# EAGLE board Electret_Microphone_Breakout_Panel_v20 (EAGLE 7.5.0), part 1 of 6
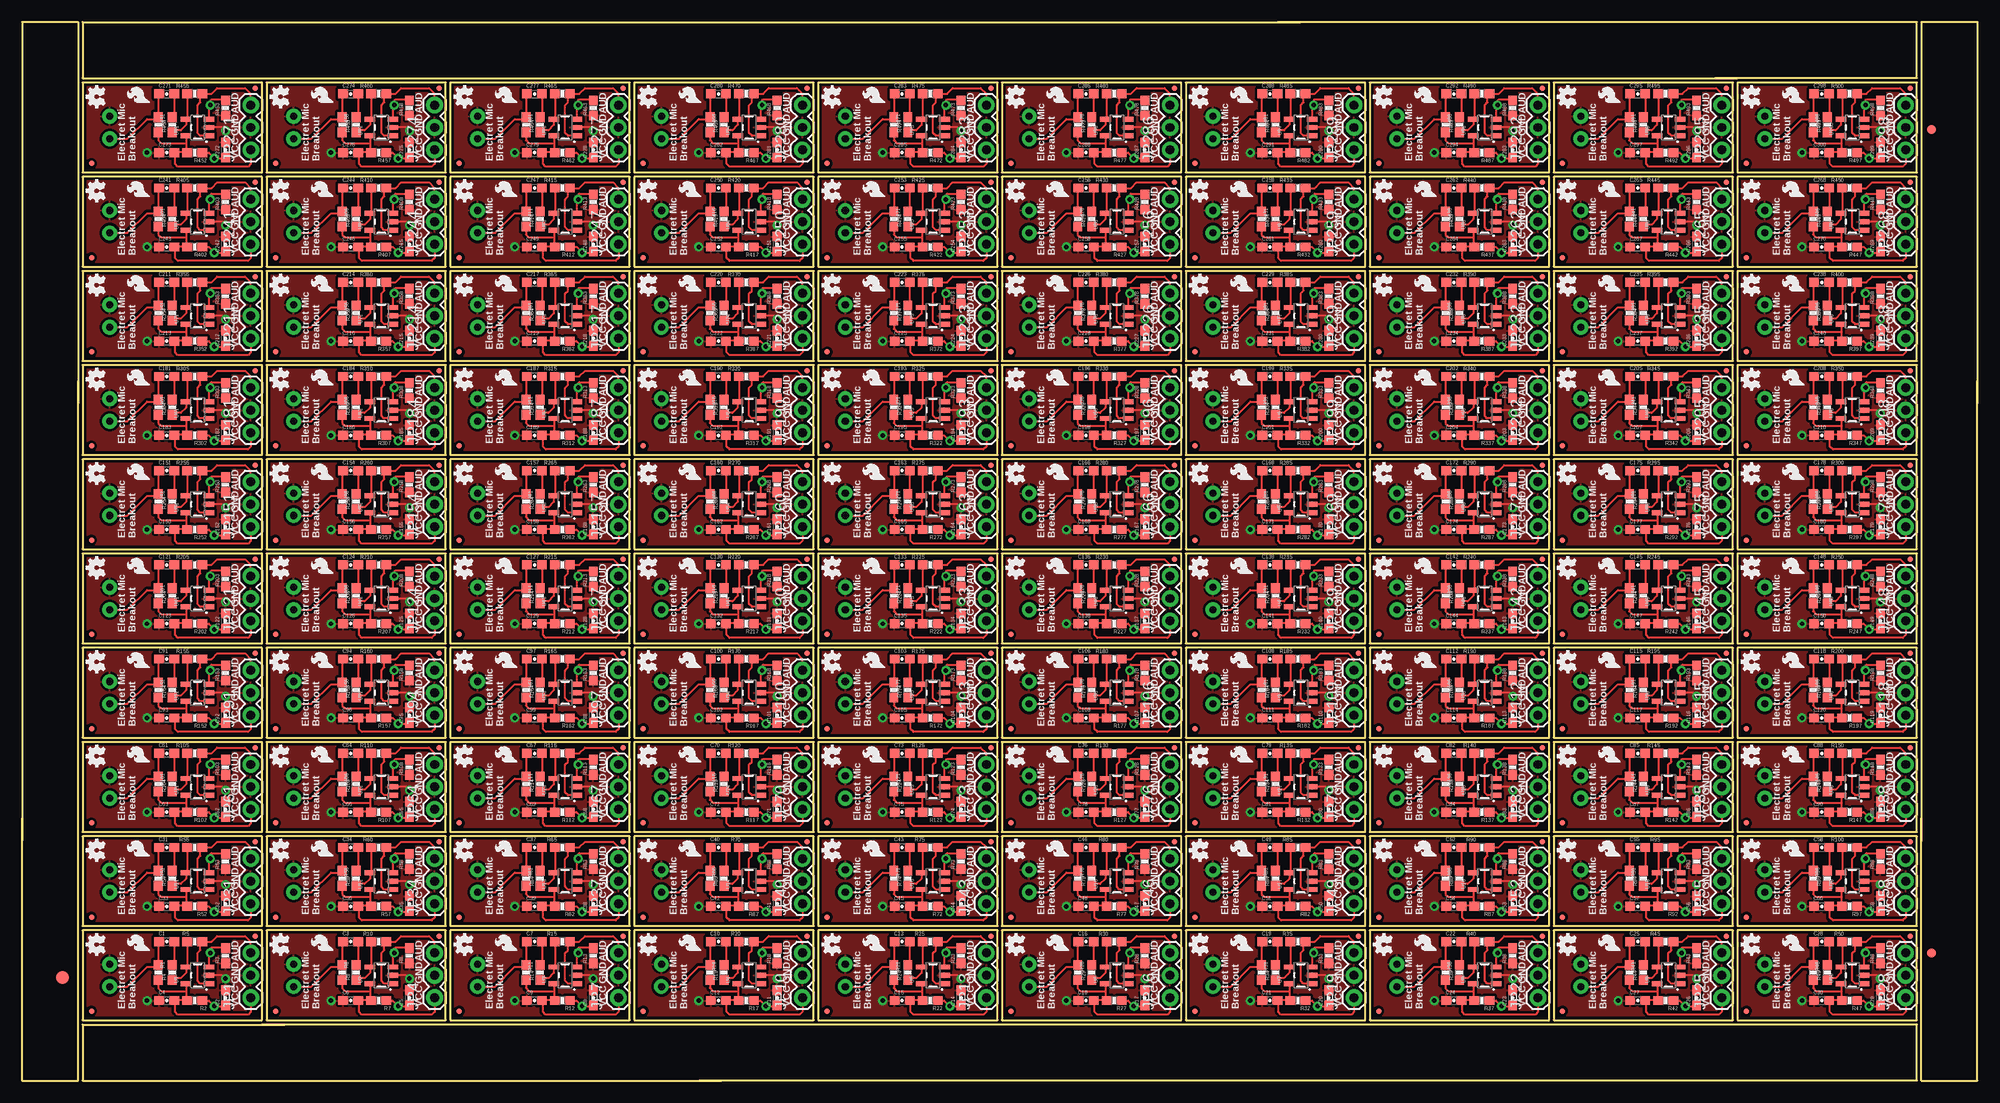
[diagram p0: board, top side]
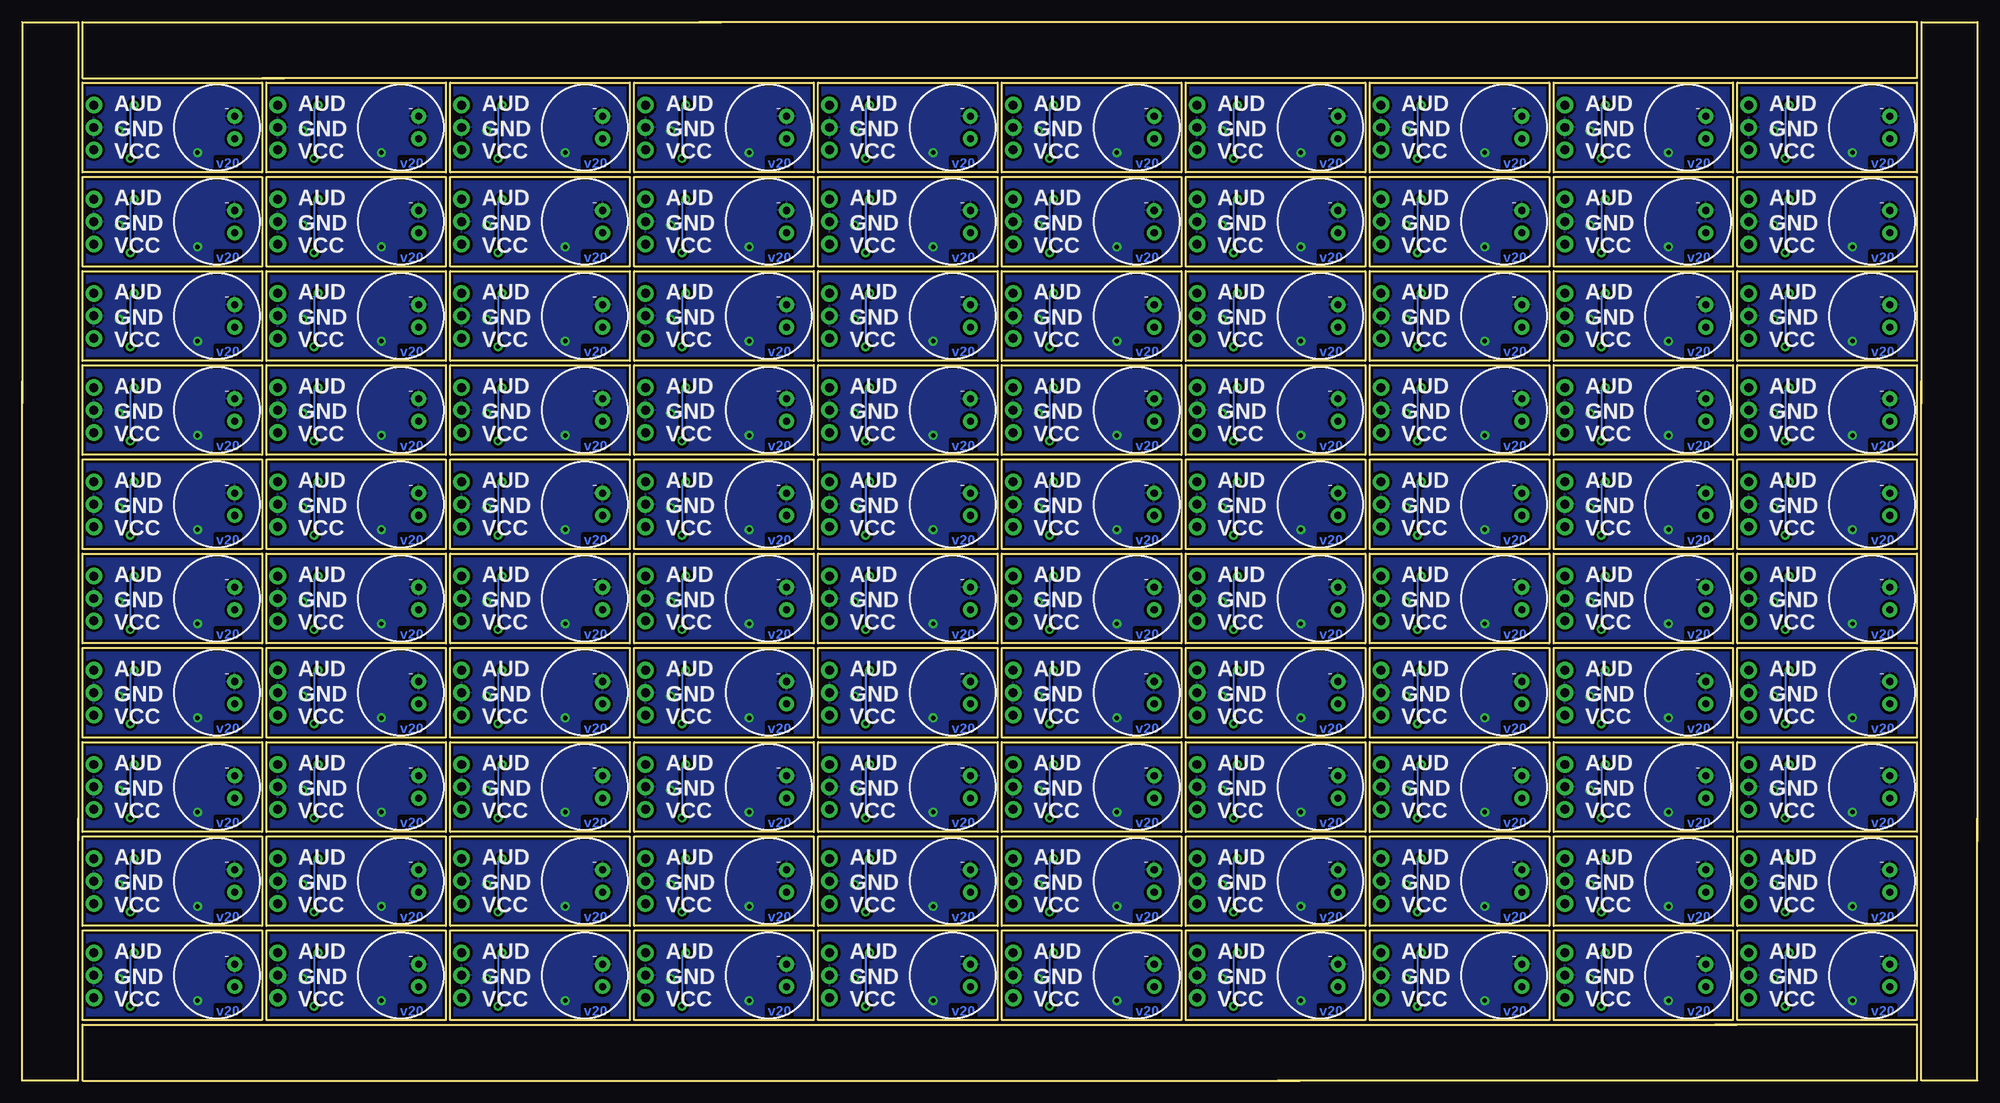
[diagram p1: board, bottom side, seen from below]

Size 221.49 x 119.89 mm. Coordinates in mm from the lower left corner, seen from the top.
Outline: 424 segments
Copper layers (1*16): Top 0.035mm / dielectric 1.5mm / Bottom 0.035mm
Design rules "SparkFun-2-layer-TIGHT *": minimum track width 10mil, minimum drill 20mil, track to track 10mil, track to pad 8mil, pad to pad 8mil, via to via 10mil, smd to smd 8mil, copper to edge 8mil, drill to drill 8mil, minimum pad ring 10mil, minimum via ring 10mil, stop-mask expansion 4mil, vias tented up to drill 20mil, thermal gap 10mil

## Footprints (pad centres in the part's own frame; a part is rotated, then mirrored left to right if it is on the bottom)
0603-CAP = smd 1.1 x 1: 1 -0.85,0; 2 0.85,0
FIDUCIAL-1.5X3 = smd 1.5 x 1.5: 1 0,0
FIDUCIAL-1X2 = smd 1 x 1: 1 0,0
1X03 = drill 1.016 pad 1.88: 1 0,0; 2 2.54,0; 3 5.08,0
MICRO-FIDUCIAL = smd 0.635 x 0.635: 1 0,0
MIC-9.7MM = drill 0.8 pad 1.676: 1 -2,1.27; 2 -2,-1.27
0603-RES = smd 1.1 x 1: 1 -0.85,0; 2 0.85,0
SOT23-5 = smd 0.55 x 1.2: 1 -0.95,-1.3; 2 0,-1.3; 3 0.95,-1.3; 4 0.95,1.3; 5 -0.95,1.3

## Placement (x,y rotation side)
C1  4.7uF  [0603-CAP]  16.38,15.75 0 top
C2  4.7uF  [0603-CAP]  23.05,9.4 90 top
C3  4.7uF  [0603-CAP]  37.21,15.75 0 top
C4  0.1uF  [0603-CAP]  16.38,9.08 0 top
C5  4.7uF  [0603-CAP]  43.88,9.4 90 top
C6  0.1uF  [0603-CAP]  37.21,9.08 0 top
C7  4.7uF  [0603-CAP]  58.04,15.75 0 top
C8  4.7uF  [0603-CAP]  64.71,9.4 90 top
C9  0.1uF  [0603-CAP]  58.04,9.08 0 top
C10  4.7uF  [0603-CAP]  78.87,15.75 0 top
C11  4.7uF  [0603-CAP]  85.53,9.4 90 top
C12  0.1uF  [0603-CAP]  78.87,9.08 0 top
C13  4.7uF  [0603-CAP]  99.69,15.75 0 top
C14  4.7uF  [0603-CAP]  106.36,9.4 90 top
C15  0.1uF  [0603-CAP]  99.69,9.08 0 top
C16  4.7uF  [0603-CAP]  120.52,15.75 0 top
C17  4.7uF  [0603-CAP]  127.19,9.4 90 top
C18  0.1uF  [0603-CAP]  120.52,9.08 0 top
C19  4.7uF  [0603-CAP]  141.35,15.75 0 top
C20  4.7uF  [0603-CAP]  148.02,9.4 90 top
C21  0.1uF  [0603-CAP]  141.35,9.08 0 top
C22  4.7uF  [0603-CAP]  162.18,15.75 0 top
C23  4.7uF  [0603-CAP]  168.85,9.4 90 top
C24  0.1uF  [0603-CAP]  162.18,9.08 0 top
C25  4.7uF  [0603-CAP]  183.01,15.75 0 top
C26  4.7uF  [0603-CAP]  189.67,9.4 90 top
C27  0.1uF  [0603-CAP]  183.01,9.08 0 top
C28  4.7uF  [0603-CAP]  203.84,15.75 0 top
C29  4.7uF  [0603-CAP]  210.5,9.4 90 top
C30  0.1uF  [0603-CAP]  203.84,9.08 0 top
C31  4.7uF  [0603-CAP]  16.38,26.42 0 top
C32  4.7uF  [0603-CAP]  23.05,20.07 90 top
C33  0.1uF  [0603-CAP]  16.38,19.75 0 top
C34  4.7uF  [0603-CAP]  37.21,26.42 0 top
C35  4.7uF  [0603-CAP]  43.88,20.07 90 top
C36  0.1uF  [0603-CAP]  37.21,19.75 0 top
C37  4.7uF  [0603-CAP]  58.04,26.42 0 top
C38  4.7uF  [0603-CAP]  64.71,20.07 90 top
C39  0.1uF  [0603-CAP]  58.04,19.75 0 top
C40  4.7uF  [0603-CAP]  78.87,26.42 0 top
C41  4.7uF  [0603-CAP]  85.53,20.07 90 top
C42  0.1uF  [0603-CAP]  78.87,19.75 0 top
C43  4.7uF  [0603-CAP]  99.69,26.42 0 top
C44  4.7uF  [0603-CAP]  106.36,20.07 90 top
C45  0.1uF  [0603-CAP]  99.69,19.75 0 top
C46  4.7uF  [0603-CAP]  120.52,26.42 0 top
C47  4.7uF  [0603-CAP]  127.19,20.07 90 top
C48  0.1uF  [0603-CAP]  120.52,19.75 0 top
C49  4.7uF  [0603-CAP]  141.35,26.42 0 top
C50  4.7uF  [0603-CAP]  148.02,20.07 90 top
C51  0.1uF  [0603-CAP]  141.35,19.75 0 top
C52  4.7uF  [0603-CAP]  162.18,26.42 0 top
C53  4.7uF  [0603-CAP]  168.85,20.07 90 top
C54  0.1uF  [0603-CAP]  162.18,19.75 0 top
C55  4.7uF  [0603-CAP]  183.01,26.42 0 top
C56  4.7uF  [0603-CAP]  189.67,20.07 90 top
C57  0.1uF  [0603-CAP]  183.01,19.75 0 top
C58  4.7uF  [0603-CAP]  203.84,26.42 0 top
C59  4.7uF  [0603-CAP]  210.5,20.07 90 top
C60  0.1uF  [0603-CAP]  203.84,19.75 0 top
C61  4.7uF  [0603-CAP]  16.38,37.08 0 top
C62  4.7uF  [0603-CAP]  23.05,30.73 90 top
C63  0.1uF  [0603-CAP]  16.38,30.42 0 top
C64  4.7uF  [0603-CAP]  37.21,37.08 0 top
C65  4.7uF  [0603-CAP]  43.88,30.73 90 top
C66  0.1uF  [0603-CAP]  37.21,30.42 0 top
C67  4.7uF  [0603-CAP]  58.04,37.08 0 top
C68  4.7uF  [0603-CAP]  64.71,30.73 90 top
C69  0.1uF  [0603-CAP]  58.04,30.42 0 top
C70  4.7uF  [0603-CAP]  78.87,37.08 0 top
C71  4.7uF  [0603-CAP]  85.53,30.73 90 top
C72  0.1uF  [0603-CAP]  78.87,30.42 0 top
C73  4.7uF  [0603-CAP]  99.69,37.08 0 top
C74  4.7uF  [0603-CAP]  106.36,30.73 90 top
C75  0.1uF  [0603-CAP]  99.69,30.42 0 top
C76  4.7uF  [0603-CAP]  120.52,37.08 0 top
C77  4.7uF  [0603-CAP]  127.19,30.73 90 top
C78  0.1uF  [0603-CAP]  120.52,30.42 0 top
C79  4.7uF  [0603-CAP]  141.35,37.08 0 top
C80  4.7uF  [0603-CAP]  148.02,30.73 90 top
C81  0.1uF  [0603-CAP]  141.35,30.42 0 top
C82  4.7uF  [0603-CAP]  162.18,37.08 0 top
C83  4.7uF  [0603-CAP]  168.85,30.73 90 top
C84  0.1uF  [0603-CAP]  162.18,30.42 0 top
C85  4.7uF  [0603-CAP]  183.01,37.08 0 top
C86  4.7uF  [0603-CAP]  189.67,30.73 90 top
C87  0.1uF  [0603-CAP]  183.01,30.42 0 top
C88  4.7uF  [0603-CAP]  203.84,37.08 0 top
C89  4.7uF  [0603-CAP]  210.5,30.73 90 top
C90  0.1uF  [0603-CAP]  203.84,30.42 0 top
C91  4.7uF  [0603-CAP]  16.38,47.75 0 top
C92  4.7uF  [0603-CAP]  23.05,41.4 90 top
C93  0.1uF  [0603-CAP]  16.38,41.08 0 top
C94  4.7uF  [0603-CAP]  37.21,47.75 0 top
C95  4.7uF  [0603-CAP]  43.88,41.4 90 top
C96  0.1uF  [0603-CAP]  37.21,41.08 0 top
C97  4.7uF  [0603-CAP]  58.04,47.75 0 top
C98  4.7uF  [0603-CAP]  64.71,41.4 90 top
C99  0.1uF  [0603-CAP]  58.04,41.08 0 top
C100  4.7uF  [0603-CAP]  78.87,47.75 0 top
C101  4.7uF  [0603-CAP]  85.53,41.4 90 top
C102  0.1uF  [0603-CAP]  78.87,41.08 0 top
C103  4.7uF  [0603-CAP]  99.69,47.75 0 top
C104  4.7uF  [0603-CAP]  106.36,41.4 90 top
C105  0.1uF  [0603-CAP]  99.69,41.08 0 top
C106  4.7uF  [0603-CAP]  120.52,47.75 0 top
C107  4.7uF  [0603-CAP]  127.19,41.4 90 top
C108  0.1uF  [0603-CAP]  120.52,41.08 0 top
C109  4.7uF  [0603-CAP]  141.35,47.75 0 top
C110  4.7uF  [0603-CAP]  148.02,41.4 90 top
C111  0.1uF  [0603-CAP]  141.35,41.08 0 top
C112  4.7uF  [0603-CAP]  162.18,47.75 0 top
C113  4.7uF  [0603-CAP]  168.85,41.4 90 top
C114  0.1uF  [0603-CAP]  162.18,41.08 0 top
C115  4.7uF  [0603-CAP]  183.01,47.75 0 top
C116  4.7uF  [0603-CAP]  189.67,41.4 90 top
C117  0.1uF  [0603-CAP]  183.01,41.08 0 top
C118  4.7uF  [0603-CAP]  203.84,47.75 0 top
C119  4.7uF  [0603-CAP]  210.5,41.4 90 top
C120  0.1uF  [0603-CAP]  203.84,41.08 0 top
C121  4.7uF  [0603-CAP]  16.38,58.42 0 top
C122  4.7uF  [0603-CAP]  23.05,52.07 90 top
C123  0.1uF  [0603-CAP]  16.38,51.75 0 top
C124  4.7uF  [0603-CAP]  37.21,58.42 0 top
C125  4.7uF  [0603-CAP]  43.88,52.07 90 top
C126  0.1uF  [0603-CAP]  37.21,51.75 0 top
C127  4.7uF  [0603-CAP]  58.04,58.42 0 top
C128  4.7uF  [0603-CAP]  64.71,52.07 90 top
C129  0.1uF  [0603-CAP]  58.04,51.75 0 top
C130  4.7uF  [0603-CAP]  78.87,58.42 0 top
C131  4.7uF  [0603-CAP]  85.53,52.07 90 top
C132  0.1uF  [0603-CAP]  78.87,51.75 0 top
C133  4.7uF  [0603-CAP]  99.69,58.42 0 top
C134  4.7uF  [0603-CAP]  106.36,52.07 90 top
C135  0.1uF  [0603-CAP]  99.69,51.75 0 top
C136  4.7uF  [0603-CAP]  120.52,58.42 0 top
C137  4.7uF  [0603-CAP]  127.19,52.07 90 top
C138  0.1uF  [0603-CAP]  120.52,51.75 0 top
C139  4.7uF  [0603-CAP]  141.35,58.42 0 top
C140  4.7uF  [0603-CAP]  148.02,52.07 90 top
C141  0.1uF  [0603-CAP]  141.35,51.75 0 top
C142  4.7uF  [0603-CAP]  162.18,58.42 0 top
C143  4.7uF  [0603-CAP]  168.85,52.07 90 top
C144  0.1uF  [0603-CAP]  162.18,51.75 0 top
C145  4.7uF  [0603-CAP]  183.01,58.42 0 top
C146  4.7uF  [0603-CAP]  189.67,52.07 90 top
C147  0.1uF  [0603-CAP]  183.01,51.75 0 top
C148  4.7uF  [0603-CAP]  203.84,58.42 0 top
C149  4.7uF  [0603-CAP]  210.5,52.07 90 top
C150  0.1uF  [0603-CAP]  203.84,51.75 0 top
C151  4.7uF  [0603-CAP]  16.38,69.09 0 top
C152  4.7uF  [0603-CAP]  23.05,62.74 90 top
C153  0.1uF  [0603-CAP]  16.38,62.42 0 top
C154  4.7uF  [0603-CAP]  37.21,69.09 0 top
C155  4.7uF  [0603-CAP]  43.88,62.74 90 top
C156  0.1uF  [0603-CAP]  37.21,62.42 0 top
C157  4.7uF  [0603-CAP]  58.04,69.09 0 top
C158  4.7uF  [0603-CAP]  64.71,62.74 90 top
C159  0.1uF  [0603-CAP]  58.04,62.42 0 top
C160  4.7uF  [0603-CAP]  78.87,69.09 0 top
C161  4.7uF  [0603-CAP]  85.53,62.74 90 top
C162  0.1uF  [0603-CAP]  78.87,62.42 0 top
C163  4.7uF  [0603-CAP]  99.69,69.09 0 top
C164  4.7uF  [0603-CAP]  106.36,62.74 90 top
C165  0.1uF  [0603-CAP]  99.69,62.42 0 top
C166  4.7uF  [0603-CAP]  120.52,69.09 0 top
C167  4.7uF  [0603-CAP]  127.19,62.74 90 top
C168  0.1uF  [0603-CAP]  120.52,62.42 0 top
C169  4.7uF  [0603-CAP]  141.35,69.09 0 top
C170  4.7uF  [0603-CAP]  148.02,62.74 90 top
C171  0.1uF  [0603-CAP]  141.35,62.42 0 top
C172  4.7uF  [0603-CAP]  162.18,69.09 0 top
C173  4.7uF  [0603-CAP]  168.85,62.74 90 top
C174  0.1uF  [0603-CAP]  162.18,62.42 0 top
C175  4.7uF  [0603-CAP]  183.01,69.09 0 top
C176  4.7uF  [0603-CAP]  189.67,62.74 90 top
C177  0.1uF  [0603-CAP]  183.01,62.42 0 top
C178  4.7uF  [0603-CAP]  203.84,69.09 0 top
C179  4.7uF  [0603-CAP]  210.5,62.74 90 top
C180  0.1uF  [0603-CAP]  203.84,62.42 0 top
C181  4.7uF  [0603-CAP]  16.38,79.76 0 top
C182  4.7uF  [0603-CAP]  23.05,73.41 90 top
C183  0.1uF  [0603-CAP]  16.38,73.09 0 top
C184  4.7uF  [0603-CAP]  37.21,79.76 0 top
C185  4.7uF  [0603-CAP]  43.88,73.41 90 top
C186  0.1uF  [0603-CAP]  37.21,73.09 0 top
C187  4.7uF  [0603-CAP]  58.04,79.76 0 top
C188  4.7uF  [0603-CAP]  64.71,73.41 90 top
C189  0.1uF  [0603-CAP]  58.04,73.09 0 top
C190  4.7uF  [0603-CAP]  78.87,79.76 0 top
C191  4.7uF  [0603-CAP]  85.53,73.41 90 top
C192  0.1uF  [0603-CAP]  78.87,73.09 0 top
C193  4.7uF  [0603-CAP]  99.69,79.76 0 top
C194  4.7uF  [0603-CAP]  106.36,73.41 90 top
C195  0.1uF  [0603-CAP]  99.69,73.09 0 top
C196  4.7uF  [0603-CAP]  120.52,79.76 0 top
C197  4.7uF  [0603-CAP]  127.19,73.41 90 top
C198  0.1uF  [0603-CAP]  120.52,73.09 0 top
C199  4.7uF  [0603-CAP]  141.35,79.76 0 top
C200  4.7uF  [0603-CAP]  148.02,73.41 90 top
C201  0.1uF  [0603-CAP]  141.35,73.09 0 top
C202  4.7uF  [0603-CAP]  162.18,79.76 0 top
C203  4.7uF  [0603-CAP]  168.85,73.41 90 top
C204  0.1uF  [0603-CAP]  162.18,73.09 0 top
C205  4.7uF  [0603-CAP]  183.01,79.76 0 top
C206  4.7uF  [0603-CAP]  189.67,73.41 90 top
C207  0.1uF  [0603-CAP]  183.01,73.09 0 top
C208  4.7uF  [0603-CAP]  203.84,79.76 0 top
C209  4.7uF  [0603-CAP]  210.5,73.41 90 top
C210  0.1uF  [0603-CAP]  203.84,73.09 0 top
C211  4.7uF  [0603-CAP]  16.38,90.42 0 top
C212  4.7uF  [0603-CAP]  23.05,84.07 90 top
C213  0.1uF  [0603-CAP]  16.38,83.76 0 top
C214  4.7uF  [0603-CAP]  37.21,90.42 0 top
C215  4.7uF  [0603-CAP]  43.88,84.07 90 top
C216  0.1uF  [0603-CAP]  37.21,83.76 0 top
C217  4.7uF  [0603-CAP]  58.04,90.42 0 top
C218  4.7uF  [0603-CAP]  64.71,84.07 90 top
C219  0.1uF  [0603-CAP]  58.04,83.76 0 top
C220  4.7uF  [0603-CAP]  78.87,90.42 0 top
C221  4.7uF  [0603-CAP]  85.53,84.07 90 top
C222  0.1uF  [0603-CAP]  78.87,83.76 0 top
C223  4.7uF  [0603-CAP]  99.69,90.42 0 top
C224  4.7uF  [0603-CAP]  106.36,84.07 90 top
C225  0.1uF  [0603-CAP]  99.69,83.76 0 top
C226  4.7uF  [0603-CAP]  120.52,90.42 0 top
C227  4.7uF  [0603-CAP]  127.19,84.07 90 top
C228  0.1uF  [0603-CAP]  120.52,83.76 0 top
C229  4.7uF  [0603-CAP]  141.35,90.42 0 top
C230  4.7uF  [0603-CAP]  148.02,84.07 90 top
C231  0.1uF  [0603-CAP]  141.35,83.76 0 top
C232  4.7uF  [0603-CAP]  162.18,90.42 0 top
C233  4.7uF  [0603-CAP]  168.85,84.07 90 top
C234  0.1uF  [0603-CAP]  162.18,83.76 0 top
C235  4.7uF  [0603-CAP]  183.01,90.42 0 top
C236  4.7uF  [0603-CAP]  189.67,84.07 90 top
C237  0.1uF  [0603-CAP]  183.01,83.76 0 top
C238  4.7uF  [0603-CAP]  203.84,90.42 0 top
C239  4.7uF  [0603-CAP]  210.5,84.07 90 top
C240  0.1uF  [0603-CAP]  203.84,83.76 0 top
C241  4.7uF  [0603-CAP]  16.38,101.09 0 top
C242  4.7uF  [0603-CAP]  23.05,94.74 90 top
C243  0.1uF  [0603-CAP]  16.38,94.42 0 top
C244  4.7uF  [0603-CAP]  37.21,101.09 0 top
C245  4.7uF  [0603-CAP]  43.88,94.74 90 top
C246  0.1uF  [0603-CAP]  37.21,94.42 0 top
C247  4.7uF  [0603-CAP]  58.04,101.09 0 top
C248  4.7uF  [0603-CAP]  64.71,94.74 90 top
C249  0.1uF  [0603-CAP]  58.04,94.42 0 top
C250  4.7uF  [0603-CAP]  78.87,101.09 0 top
C251  4.7uF  [0603-CAP]  85.53,94.74 90 top
C252  0.1uF  [0603-CAP]  78.87,94.42 0 top
C253  4.7uF  [0603-CAP]  99.69,101.09 0 top
C254  4.7uF  [0603-CAP]  106.36,94.74 90 top
C255  0.1uF  [0603-CAP]  99.69,94.42 0 top
C256  4.7uF  [0603-CAP]  120.52,101.09 0 top
C257  4.7uF  [0603-CAP]  127.19,94.74 90 top
C258  0.1uF  [0603-CAP]  120.52,94.42 0 top
C259  4.7uF  [0603-CAP]  141.35,101.09 0 top
C260  4.7uF  [0603-CAP]  148.02,94.74 90 top
C261  0.1uF  [0603-CAP]  141.35,94.42 0 top
C262  4.7uF  [0603-CAP]  162.18,101.09 0 top
C263  4.7uF  [0603-CAP]  168.85,94.74 90 top
C264  0.1uF  [0603-CAP]  162.18,94.42 0 top
C265  4.7uF  [0603-CAP]  183.01,101.09 0 top
C266  4.7uF  [0603-CAP]  189.67,94.74 90 top
C267  0.1uF  [0603-CAP]  183.01,94.42 0 top
C268  4.7uF  [0603-CAP]  203.84,101.09 0 top
C269  4.7uF  [0603-CAP]  210.5,94.74 90 top
C270  0.1uF  [0603-CAP]  203.84,94.42 0 top
C271  4.7uF  [0603-CAP]  16.38,111.76 0 top
C272  4.7uF  [0603-CAP]  23.05,105.41 90 top
C273  0.1uF  [0603-CAP]  16.38,105.09 0 top
C274  4.7uF  [0603-CAP]  37.21,111.76 0 top
C275  4.7uF  [0603-CAP]  43.88,105.41 90 top
C276  0.1uF  [0603-CAP]  37.21,105.09 0 top
C277  4.7uF  [0603-CAP]  58.04,111.76 0 top
C278  4.7uF  [0603-CAP]  64.71,105.41 90 top
C279  0.1uF  [0603-CAP]  58.04,105.09 0 top
C280  4.7uF  [0603-CAP]  78.87,111.76 0 top
C281  4.7uF  [0603-CAP]  85.53,105.41 90 top
C282  0.1uF  [0603-CAP]  78.87,105.09 0 top
C283  4.7uF  [0603-CAP]  99.69,111.76 0 top
C284  4.7uF  [0603-CAP]  106.36,105.41 90 top
C285  0.1uF  [0603-CAP]  99.69,105.09 0 top
C286  4.7uF  [0603-CAP]  120.52,111.76 0 top
C287  4.7uF  [0603-CAP]  127.19,105.41 90 top
C288  0.1uF  [0603-CAP]  120.52,105.09 0 top
C289  4.7uF  [0603-CAP]  141.35,111.76 0 top
C290  4.7uF  [0603-CAP]  148.02,105.41 90 top
C291  0.1uF  [0603-CAP]  141.35,105.09 0 top
C292  4.7uF  [0603-CAP]  162.18,111.76 0 top
C293  4.7uF  [0603-CAP]  168.85,105.41 90 top
C294  0.1uF  [0603-CAP]  162.18,105.09 0 top
C295  4.7uF  [0603-CAP]  183.01,111.76 0 top
C296  4.7uF  [0603-CAP]  189.67,105.41 90 top
C297  0.1uF  [0603-CAP]  183.01,105.09 0 top
C298  4.7uF  [0603-CAP]  203.84,111.76 0 top
C299  4.7uF  [0603-CAP]  210.5,105.41 90 top
C300  0.1uF  [0603-CAP]  203.84,105.09 0 top
E$1  [FIDUCIAL-1.5X3]  4.57,11.68 0 top
E$5  [FIDUCIAL-1X2]  216.28,14.48 0 top
E$6  [FIDUCIAL-1X2]  216.28,107.7 180 top
JP1  [1X03]  25.91,9.4 90 top
JP2  FIDUCIALUFIDUCIAL  [MICRO-FIDUCIAL]  26.42,16.38 0 top
JP3  FIDUCIALUFIDUCIAL  [MICRO-FIDUCIAL]  7.87,7.87 0 top
JP4  [1X03]  46.74,9.4 90 top
JP5  FIDUCIALUFIDUCIAL  [MICRO-FIDUCIAL]  47.24,16.38 0 top
JP6  FIDUCIALUFIDUCIAL  [MICRO-FIDUCIAL]  28.7,7.87 0 top
JP7  [1X03]  67.56,9.4 90 top
JP8  FIDUCIALUFIDUCIAL  [MICRO-FIDUCIAL]  68.07,16.38 0 top
JP9  FIDUCIALUFIDUCIAL  [MICRO-FIDUCIAL]  49.53,7.87 0 top
JP10  [1X03]  88.39,9.4 90 top
JP11  FIDUCIALUFIDUCIAL  [MICRO-FIDUCIAL]  88.9,16.38 0 top
JP12  FIDUCIALUFIDUCIAL  [MICRO-FIDUCIAL]  70.36,7.87 0 top
JP13  [1X03]  109.22,9.4 90 top
JP14  FIDUCIALUFIDUCIAL  [MICRO-FIDUCIAL]  109.73,16.38 0 top
JP15  FIDUCIALUFIDUCIAL  [MICRO-FIDUCIAL]  91.19,7.87 0 top
JP16  [1X03]  130.05,9.4 90 top
JP17  FIDUCIALUFIDUCIAL  [MICRO-FIDUCIAL]  130.56,16.38 0 top
JP18  FIDUCIALUFIDUCIAL  [MICRO-FIDUCIAL]  112.01,7.87 0 top
JP19  [1X03]  150.88,9.4 90 top
JP20  FIDUCIALUFIDUCIAL  [MICRO-FIDUCIAL]  151.38,16.38 0 top
JP21  FIDUCIALUFIDUCIAL  [MICRO-FIDUCIAL]  132.84,7.87 0 top
JP22  [1X03]  171.7,9.4 90 top
JP23  FIDUCIALUFIDUCIAL  [MICRO-FIDUCIAL]  172.21,16.38 0 top
JP24  FIDUCIALUFIDUCIAL  [MICRO-FIDUCIAL]  153.67,7.87 0 top
JP25  [1X03]  192.53,9.4 90 top
JP26  FIDUCIALUFIDUCIAL  [MICRO-FIDUCIAL]  193.04,16.38 0 top
JP27  FIDUCIALUFIDUCIAL  [MICRO-FIDUCIAL]  174.5,7.87 0 top
JP28  [1X03]  213.36,9.4 90 top
JP29  FIDUCIALUFIDUCIAL  [MICRO-FIDUCIAL]  213.87,16.38 0 top
JP30  FIDUCIALUFIDUCIAL  [MICRO-FIDUCIAL]  195.33,7.87 0 top
JP31  [1X03]  25.91,20.07 90 top
JP32  FIDUCIALUFIDUCIAL  [MICRO-FIDUCIAL]  26.42,27.05 0 top
JP33  FIDUCIALUFIDUCIAL  [MICRO-FIDUCIAL]  7.87,18.54 0 top
JP34  [1X03]  46.74,20.07 90 top
JP35  FIDUCIALUFIDUCIAL  [MICRO-FIDUCIAL]  47.24,27.05 0 top
JP36  FIDUCIALUFIDUCIAL  [MICRO-FIDUCIAL]  28.7,18.54 0 top
JP37  [1X03]  67.56,20.07 90 top
JP38  FIDUCIALUFIDUCIAL  [MICRO-FIDUCIAL]  68.07,27.05 0 top
JP39  FIDUCIALUFIDUCIAL  [MICRO-FIDUCIAL]  49.53,18.54 0 top
JP40  [1X03]  88.39,20.07 90 top
JP41  FIDUCIALUFIDUCIAL  [MICRO-FIDUCIAL]  88.9,27.05 0 top
JP42  FIDUCIALUFIDUCIAL  [MICRO-FIDUCIAL]  70.36,18.54 0 top
JP43  [1X03]  109.22,20.07 90 top
JP44  FIDUCIALUFIDUCIAL  [MICRO-FIDUCIAL]  109.73,27.05 0 top
JP45  FIDUCIALUFIDUCIAL  [MICRO-FIDUCIAL]  91.19,18.54 0 top
JP46  [1X03]  130.05,20.07 90 top
JP47  FIDUCIALUFIDUCIAL  [MICRO-FIDUCIAL]  130.56,27.05 0 top
JP48  FIDUCIALUFIDUCIAL  [MICRO-FIDUCIAL]  112.01,18.54 0 top
JP49  [1X03]  150.88,20.07 90 top
JP50  FIDUCIALUFIDUCIAL  [MICRO-FIDUCIAL]  151.38,27.05 0 top
JP51  FIDUCIALUFIDUCIAL  [MICRO-FIDUCIAL]  132.84,18.54 0 top
JP52  [1X03]  171.7,20.07 90 top
JP53  FIDUCIALUFIDUCIAL  [MICRO-FIDUCIAL]  172.21,27.05 0 top
JP54  FIDUCIALUFIDUCIAL  [MICRO-FIDUCIAL]  153.67,18.54 0 top
JP55  [1X03]  192.53,20.07 90 top
JP56  FIDUCIALUFIDUCIAL  [MICRO-FIDUCIAL]  193.04,27.05 0 top
JP57  FIDUCIALUFIDUCIAL  [MICRO-FIDUCIAL]  174.5,18.54 0 top
JP58  [1X03]  213.36,20.07 90 top
JP59  FIDUCIALUFIDUCIAL  [MICRO-FIDUCIAL]  213.87,27.05 0 top
JP60  FIDUCIALUFIDUCIAL  [MICRO-FIDUCIAL]  195.33,18.54 0 top
JP61  [1X03]  25.91,30.73 90 top
JP62  FIDUCIALUFIDUCIAL  [MICRO-FIDUCIAL]  26.42,37.72 0 top
JP63  FIDUCIALUFIDUCIAL  [MICRO-FIDUCIAL]  7.87,29.21 0 top
JP64  [1X03]  46.74,30.73 90 top
JP65  FIDUCIALUFIDUCIAL  [MICRO-FIDUCIAL]  47.24,37.72 0 top
JP66  FIDUCIALUFIDUCIAL  [MICRO-FIDUCIAL]  28.7,29.21 0 top
JP67  [1X03]  67.56,30.73 90 top
JP68  FIDUCIALUFIDUCIAL  [MICRO-FIDUCIAL]  68.07,37.72 0 top
JP69  FIDUCIALUFIDUCIAL  [MICRO-FIDUCIAL]  49.53,29.21 0 top
JP70  [1X03]  88.39,30.73 90 top
JP71  FIDUCIALUFIDUCIAL  [MICRO-FIDUCIAL]  88.9,37.72 0 top
JP72  FIDUCIALUFIDUCIAL  [MICRO-FIDUCIAL]  70.36,29.21 0 top
JP73  [1X03]  109.22,30.73 90 top
JP74  FIDUCIALUFIDUCIAL  [MICRO-FIDUCIAL]  109.73,37.72 0 top
JP75  FIDUCIALUFIDUCIAL  [MICRO-FIDUCIAL]  91.19,29.21 0 top
JP76  [1X03]  130.05,30.73 90 top
JP77  FIDUCIALUFIDUCIAL  [MICRO-FIDUCIAL]  130.56,37.72 0 top
JP78  FIDUCIALUFIDUCIAL  [MICRO-FIDUCIAL]  112.01,29.21 0 top
JP79  [1X03]  150.88,30.73 90 top
JP80  FIDUCIALUFIDUCIAL  [MICRO-FIDUCIAL]  151.38,37.72 0 top
JP81  FIDUCIALUFIDUCIAL  [MICRO-FIDUCIAL]  132.84,29.21 0 top
JP82  [1X03]  171.7,30.73 90 top
JP83  FIDUCIALUFIDUCIAL  [MICRO-FIDUCIAL]  172.21,37.72 0 top
JP84  FIDUCIALUFIDUCIAL  [MICRO-FIDUCIAL]  153.67,29.21 0 top
JP85  [1X03]  192.53,30.73 90 top
JP86  FIDUCIALUFIDUCIAL  [MICRO-FIDUCIAL]  193.04,37.72 0 top
JP87  FIDUCIALUFIDUCIAL  [MICRO-FIDUCIAL]  174.5,29.21 0 top
JP88  [1X03]  213.36,30.73 90 top
JP89  FIDUCIALUFIDUCIAL  [MICRO-FIDUCIAL]  213.87,37.72 0 top
JP90  FIDUCIALUFIDUCIAL  [MICRO-FIDUCIAL]  195.33,29.21 0 top
JP91  [1X03]  25.91,41.4 90 top
JP92  FIDUCIALUFIDUCIAL  [MICRO-FIDUCIAL]  26.42,48.39 0 top
JP93  FIDUCIALUFIDUCIAL  [MICRO-FIDUCIAL]  7.87,39.88 0 top
JP94  [1X03]  46.74,41.4 90 top
JP95  FIDUCIALUFIDUCIAL  [MICRO-FIDUCIAL]  47.24,48.39 0 top
JP96  FIDUCIALUFIDUCIAL  [MICRO-FIDUCIAL]  28.7,39.88 0 top
JP97  [1X03]  67.56,41.4 90 top
JP98  FIDUCIALUFIDUCIAL  [MICRO-FIDUCIAL]  68.07,48.39 0 top
JP99  FIDUCIALUFIDUCIAL  [MICRO-FIDUCIAL]  49.53,39.88 0 top
JP100  [1X03]  88.39,41.4 90 top
JP101  FIDUCIALUFIDUCIAL  [MICRO-FIDUCIAL]  88.9,48.39 0 top
JP102  FIDUCIALUFIDUCIAL  [MICRO-FIDUCIAL]  70.36,39.88 0 top
JP103  [1X03]  109.22,41.4 90 top
JP104  FIDUCIALUFIDUCIAL  [MICRO-FIDUCIAL]  109.73,48.39 0 top
JP105  FIDUCIALUFIDUCIAL  [MICRO-FIDUCIAL]  91.19,39.88 0 top
JP106  [1X03]  130.05,41.4 90 top
JP107  FIDUCIALUFIDUCIAL  [MICRO-FIDUCIAL]  130.56,48.39 0 top
JP108  FIDUCIALUFIDUCIAL  [MICRO-FIDUCIAL]  112.01,39.88 0 top
JP109  [1X03]  150.88,41.4 90 top
JP110  FIDUCIALUFIDUCIAL  [MICRO-FIDUCIAL]  151.38,48.39 0 top
JP111  FIDUCIALUFIDUCIAL  [MICRO-FIDUCIAL]  132.84,39.88 0 top
JP112  [1X03]  171.7,41.4 90 top
JP113  FIDUCIALUFIDUCIAL  [MICRO-FIDUCIAL]  172.21,48.39 0 top
JP114  FIDUCIALUFIDUCIAL  [MICRO-FIDUCIAL]  153.67,39.88 0 top
JP115  [1X03]  192.53,41.4 90 top
JP116  FIDUCIALUFIDUCIAL  [MICRO-FIDUCIAL]  193.04,48.39 0 top
JP117  FIDUCIALUFIDUCIAL  [MICRO-FIDUCIAL]  174.5,39.88 0 top
JP118  [1X03]  213.36,41.4 90 top
JP119  FIDUCIALUFIDUCIAL  [MICRO-FIDUCIAL]  213.87,48.39 0 top
JP120  FIDUCIALUFIDUCIAL  [MICRO-FIDUCIAL]  195.33,39.88 0 top
JP121  [1X03]  25.91,52.07 90 top
JP122  FIDUCIALUFIDUCIAL  [MICRO-FIDUCIAL]  26.42,59.05 0 top
JP123  FIDUCIALUFIDUCIAL  [MICRO-FIDUCIAL]  7.87,50.55 0 top
JP124  [1X03]  46.74,52.07 90 top
JP125  FIDUCIALUFIDUCIAL  [MICRO-FIDUCIAL]  47.24,59.05 0 top
JP126  FIDUCIALUFIDUCIAL  [MICRO-FIDUCIAL]  28.7,50.55 0 top
JP127  [1X03]  67.56,52.07 90 top
JP128  FIDUCIALUFIDUCIAL  [MICRO-FIDUCIAL]  68.07,59.05 0 top
JP129  FIDUCIALUFIDUCIAL  [MICRO-FIDUCIAL]  49.53,50.55 0 top
JP130  [1X03]  88.39,52.07 90 top
JP131  FIDUCIALUFIDUCIAL  [MICRO-FIDUCIAL]  88.9,59.05 0 top
JP132  FIDUCIALUFIDUCIAL  [MICRO-FIDUCIAL]  70.36,50.55 0 top
JP133  [1X03]  109.22,52.07 90 top
JP134  FIDUCIALUFIDUCIAL  [MICRO-FIDUCIAL]  109.73,59.05 0 top
JP135  FIDUCIALUFIDUCIAL  [MICRO-FIDUCIAL]  91.19,50.55 0 top
JP136  [1X03]  130.05,52.07 90 top
JP137  FIDUCIALUFIDUCIAL  [MICRO-FIDUCIAL]  130.56,59.05 0 top
JP138  FIDUCIALUFIDUCIAL  [MICRO-FIDUCIAL]  112.01,50.55 0 top
JP139  [1X03]  150.88,52.07 90 top
JP140  FIDUCIALUFIDUCIAL  [MICRO-FIDUCIAL]  151.38,59.05 0 top
JP141  FIDUCIALUFIDUCIAL  [MICRO-FIDUCIAL]  132.84,50.55 0 top
JP142  [1X03]  171.7,52.07 90 top
JP143  FIDUCIALUFIDUCIAL  [MICRO-FIDUCIAL]  172.21,59.05 0 top
JP144  FIDUCIALUFIDUCIAL  [MICRO-FIDUCIAL]  153.67,50.55 0 top
JP145  [1X03]  192.53,52.07 90 top
JP146  FIDUCIALUFIDUCIAL  [MICRO-FIDUCIAL]  193.04,59.05 0 top
JP147  FIDUCIALUFIDUCIAL  [MICRO-FIDUCIAL]  174.5,50.55 0 top
JP148  [1X03]  213.36,52.07 90 top
JP149  FIDUCIALUFIDUCIAL  [MICRO-FIDUCIAL]  213.87,59.05 0 top
JP150  FIDUCIALUFIDUCIAL  [MICRO-FIDUCIAL]  195.33,50.55 0 top
JP151  [1X03]  25.91,62.74 90 top
JP152  FIDUCIALUFIDUCIAL  [MICRO-FIDUCIAL]  26.42,69.72 0 top
JP153  FIDUCIALUFIDUCIAL  [MICRO-FIDUCIAL]  7.87,61.21 0 top
JP154  [1X03]  46.74,62.74 90 top
JP155  FIDUCIALUFIDUCIAL  [MICRO-FIDUCIAL]  47.24,69.72 0 top
JP156  FIDUCIALUFIDUCIAL  [MICRO-FIDUCIAL]  28.7,61.21 0 top
JP157  [1X03]  67.56,62.74 90 top
JP158  FIDUCIALUFIDUCIAL  [MICRO-FIDUCIAL]  68.07,69.72 0 top
JP159  FIDUCIALUFIDUCIAL  [MICRO-FIDUCIAL]  49.53,61.21 0 top
JP160  [1X03]  88.39,62.74 90 top
JP161  FIDUCIALUFIDUCIAL  [MICRO-FIDUCIAL]  88.9,69.72 0 top
JP162  FIDUCIALUFIDUCIAL  [MICRO-FIDUCIAL]  70.36,61.21 0 top
JP163  [1X03]  109.22,62.74 90 top
JP164  FIDUCIALUFIDUCIAL  [MICRO-FIDUCIAL]  109.73,69.72 0 top
JP165  FIDUCIALUFIDUCIAL  [MICRO-FIDUCIAL]  91.19,61.21 0 top
JP166  [1X03]  130.05,62.74 90 top
JP167  FIDUCIALUFIDUCIAL  [MICRO-FIDUCIAL]  130.56,69.72 0 top
JP168  FIDUCIALUFIDUCIAL  [MICRO-FIDUCIAL]  112.01,61.21 0 top
JP169  [1X03]  150.88,62.74 90 top
JP170  FIDUCIALUFIDUCIAL  [MICRO-FIDUCIAL]  151.38,69.72 0 top
JP171  FIDUCIALUFIDUCIAL  [MICRO-FIDUCIAL]  132.84,61.21 0 top
JP172  [1X03]  171.7,62.74 90 top
JP173  FIDUCIALUFIDUCIAL  [MICRO-FIDUCIAL]  172.21,69.72 0 top
JP174  FIDUCIALUFIDUCIAL  [MICRO-FIDUCIAL]  153.67,61.21 0 top
JP175  [1X03]  192.53,62.74 90 top
JP176  FIDUCIALUFIDUCIAL  [MICRO-FIDUCIAL]  193.04,69.72 0 top
JP177  FIDUCIALUFIDUCIAL  [MICRO-FIDUCIAL]  174.5,61.21 0 top
JP178  [1X03]  213.36,62.74 90 top
JP179  FIDUCIALUFIDUCIAL  [MICRO-FIDUCIAL]  213.87,69.72 0 top
JP180  FIDUCIALUFIDUCIAL  [MICRO-FIDUCIAL]  195.33,61.21 0 top
JP181  [1X03]  25.91,73.41 90 top
JP182  FIDUCIALUFIDUCIAL  [MICRO-FIDUCIAL]  26.42,80.39 0 top
JP183  FIDUCIALUFIDUCIAL  [MICRO-FIDUCIAL]  7.87,71.88 0 top
JP184  [1X03]  46.74,73.41 90 top
JP185  FIDUCIALUFIDUCIAL  [MICRO-FIDUCIAL]  47.24,80.39 0 top
JP186  FIDUCIALUFIDUCIAL  [MICRO-FIDUCIAL]  28.7,71.88 0 top
JP187  [1X03]  67.56,73.41 90 top
JP188  FIDUCIALUFIDUCIAL  [MICRO-FIDUCIAL]  68.07,80.39 0 top
JP189  FIDUCIALUFIDUCIAL  [MICRO-FIDUCIAL]  49.53,71.88 0 top
JP190  [1X03]  88.39,73.41 90 top
JP191  FIDUCIALUFIDUCIAL  [MICRO-FIDUCIAL]  88.9,80.39 0 top
JP192  FIDUCIALUFIDUCIAL  [MICRO-FIDUCIAL]  70.36,71.88 0 top
JP193  [1X03]  109.22,73.41 90 top
JP194  FIDUCIALUFIDUCIAL  [MICRO-FIDUCIAL]  109.73,80.39 0 top
JP195  FIDUCIALUFIDUCIAL  [MICRO-FIDUCIAL]  91.19,71.88 0 top
JP196  [1X03]  130.05,73.41 90 top
JP197  FIDUCIALUFIDUCIAL  [MICRO-FIDUCIAL]  130.56,80.39 0 top
JP198  FIDUCIALUFIDUCIAL  [MICRO-FIDUCIAL]  112.01,71.88 0 top
JP199  [1X03]  150.88,73.41 90 top
JP200  FIDUCIALUFIDUCIAL  [MICRO-FIDUCIAL]  151.38,80.39 0 top
JP201  FIDUCIALUFIDUCIAL  [MICRO-FIDUCIAL]  132.84,71.88 0 top
JP202  [1X03]  171.7,73.41 90 top
JP203  FIDUCIALUFIDUCIAL  [MICRO-FIDUCIAL]  172.21,80.39 0 top
JP204  FIDUCIALUFIDUCIAL  [MICRO-FIDUCIAL]  153.67,71.88 0 top
JP205  [1X03]  192.53,73.41 90 top
JP206  FIDUCIALUFIDUCIAL  [MICRO-FIDUCIAL]  193.04,80.39 0 top
JP207  FIDUCIALUFIDUCIAL  [MICRO-FIDUCIAL]  174.5,71.88 0 top
JP208  [1X03]  213.36,73.41 90 top
JP209  FIDUCIALUFIDUCIAL  [MICRO-FIDUCIAL]  213.87,80.39 0 top
JP210  FIDUCIALUFIDUCIAL  [MICRO-FIDUCIAL]  195.33,71.88 0 top
JP211  [1X03]  25.91,84.07 90 top
JP212  FIDUCIALUFIDUCIAL  [MICRO-FIDUCIAL]  26.42,91.06 0 top
JP213  FIDUCIALUFIDUCIAL  [MICRO-FIDUCIAL]  7.87,82.55 0 top
JP214  [1X03]  46.74,84.07 90 top
JP215  FIDUCIALUFIDUCIAL  [MICRO-FIDUCIAL]  47.24,91.06 0 top
JP216  FIDUCIALUFIDUCIAL  [MICRO-FIDUCIAL]  28.7,82.55 0 top
JP217  [1X03]  67.56,84.07 90 top
JP218  FIDUCIALUFIDUCIAL  [MICRO-FIDUCIAL]  68.07,91.06 0 top
JP219  FIDUCIALUFIDUCIAL  [MICRO-FIDUCIAL]  49.53,82.55 0 top
JP220  [1X03]  88.39,84.07 90 top
JP221  FIDUCIALUFIDUCIAL  [MICRO-FIDUCIAL]  88.9,91.06 0 top
JP222  FIDUCIALUFIDUCIAL  [MICRO-FIDUCIAL]  70.36,82.55 0 top
JP223  [1X03]  109.22,84.07 90 top
JP224  FIDUCIALUFIDUCIAL  [MICRO-FIDUCIAL]  109.73,91.06 0 top
JP225  FIDUCIALUFIDUCIAL  [MICRO-FIDUCIAL]  91.19,82.55 0 top
JP226  [1X03]  130.05,84.07 90 top
JP227  FIDUCIALUFIDUCIAL  [MICRO-FIDUCIAL]  130.56,91.06 0 top
JP228  FIDUCIALUFIDUCIAL  [MICRO-FIDUCIAL]  112.01,82.55 0 top
JP229  [1X03]  150.88,84.07 90 top
JP230  FIDUCIALUFIDUCIAL  [MICRO-FIDUCIAL]  151.38,91.06 0 top
JP231  FIDUCIALUFIDUCIAL  [MICRO-FIDUCIAL]  132.84,82.55 0 top
JP232  [1X03]  171.7,84.07 90 top
JP233  FIDUCIALUFIDUCIAL  [MICRO-FIDUCIAL]  172.21,91.06 0 top
JP234  FIDUCIALUFIDUCIAL  [MICRO-FIDUCIAL]  153.67,82.55 0 top
JP235  [1X03]  192.53,84.07 90 top
JP236  FIDUCIALUFIDUCIAL  [MICRO-FIDUCIAL]  193.04,91.06 0 top
JP237  FIDUCIALUFIDUCIAL  [MICRO-FIDUCIAL]  174.5,82.55 0 top
JP238  [1X03]  213.36,84.07 90 top
JP239  FIDUCIALUFIDUCIAL  [MICRO-FIDUCIAL]  213.87,91.06 0 top
JP240  FIDUCIALUFIDUCIAL  [MICRO-FIDUCIAL]  195.33,82.55 0 top
JP241  [1X03]  25.91,94.74 90 top
JP242  FIDUCIALUFIDUCIAL  [MICRO-FIDUCIAL]  26.42,101.73 0 top
JP243  FIDUCIALUFIDUCIAL  [MICRO-FIDUCIAL]  7.87,93.22 0 top
JP244  [1X03]  46.74,94.74 90 top
JP245  FIDUCIALUFIDUCIAL  [MICRO-FIDUCIAL]  47.24,101.73 0 top
JP246  FIDUCIALUFIDUCIAL  [MICRO-FIDUCIAL]  28.7,93.22 0 top
JP247  [1X03]  67.56,94.74 90 top
JP248  FIDUCIALUFIDUCIAL  [MICRO-FIDUCIAL]  68.07,101.73 0 top
JP249  FIDUCIALUFIDUCIAL  [MICRO-FIDUCIAL]  49.53,93.22 0 top
JP250  [1X03]  88.39,94.74 90 top
JP251  FIDUCIALUFIDUCIAL  [MICRO-FIDUCIAL]  88.9,101.73 0 top
JP252  FIDUCIALUFIDUCIAL  [MICRO-FIDUCIAL]  70.36,93.22 0 top
JP253  [1X03]  109.22,94.74 90 top
JP254  FIDUCIALUFIDUCIAL  [MICRO-FIDUCIAL]  109.73,101.73 0 top
JP255  FIDUCIALUFIDUCIAL  [MICRO-FIDUCIAL]  91.19,93.22 0 top
JP256  [1X03]  130.05,94.74 90 top
JP257  FIDUCIALUFIDUCIAL  [MICRO-FIDUCIAL]  130.56,101.73 0 top
JP258  FIDUCIALUFIDUCIAL  [MICRO-FIDUCIAL]  112.01,93.22 0 top
JP259  [1X03]  150.88,94.74 90 top
JP260  FIDUCIALUFIDUCIAL  [MICRO-FIDUCIAL]  151.38,101.73 0 top
JP261  FIDUCIALUFIDUCIAL  [MICRO-FIDUCIAL]  132.84,93.22 0 top
JP262  [1X03]  171.7,94.74 90 top
JP263  FIDUCIALUFIDUCIAL  [MICRO-FIDUCIAL]  172.21,101.73 0 top
JP264  FIDUCIALUFIDUCIAL  [MICRO-FIDUCIAL]  153.67,93.22 0 top
JP265  [1X03]  192.53,94.74 90 top
JP266  FIDUCIALUFIDUCIAL  [MICRO-FIDUCIAL]  193.04,101.73 0 top
JP267  FIDUCIALUFIDUCIAL  [MICRO-FIDUCIAL]  174.5,93.22 0 top
JP268  [1X03]  213.36,94.74 90 top
JP269  FIDUCIALUFIDUCIAL  [MICRO-FIDUCIAL]  213.87,101.73 0 top
JP270  FIDUCIALUFIDUCIAL  [MICRO-FIDUCIAL]  195.33,93.22 0 top
JP271  [1X03]  25.91,105.41 90 top
JP272  FIDUCIALUFIDUCIAL  [MICRO-FIDUCIAL]  26.42,112.39 0 top
JP273  FIDUCIALUFIDUCIAL  [MICRO-FIDUCIAL]  7.87,103.89 0 top
JP274  [1X03]  46.74,105.41 90 top
JP275  FIDUCIALUFIDUCIAL  [MICRO-FIDUCIAL]  47.24,112.39 0 top
JP276  FIDUCIALUFIDUCIAL  [MICRO-FIDUCIAL]  28.7,103.89 0 top
JP277  [1X03]  67.56,105.41 90 top
JP278  FIDUCIALUFIDUCIAL  [MICRO-FIDUCIAL]  68.07,112.39 0 top
JP279  FIDUCIALUFIDUCIAL  [MICRO-FIDUCIAL]  49.53,103.89 0 top
JP280  [1X03]  88.39,105.41 90 top
JP281  FIDUCIALUFIDUCIAL  [MICRO-FIDUCIAL]  88.9,112.39 0 top
JP282  FIDUCIALUFIDUCIAL  [MICRO-FIDUCIAL]  70.36,103.89 0 top
JP283  [1X03]  109.22,105.41 90 top
JP284  FIDUCIALUFIDUCIAL  [MICRO-FIDUCIAL]  109.73,112.39 0 top
JP285  FIDUCIALUFIDUCIAL  [MICRO-FIDUCIAL]  91.19,103.89 0 top
JP286  [1X03]  130.05,105.41 90 top
JP287  FIDUCIALUFIDUCIAL  [MICRO-FIDUCIAL]  130.56,112.39 0 top
JP288  FIDUCIALUFIDUCIAL  [MICRO-FIDUCIAL]  112.01,103.89 0 top
JP289  [1X03]  150.88,105.41 90 top
JP290  FIDUCIALUFIDUCIAL  [MICRO-FIDUCIAL]  151.38,112.39 0 top
JP291  FIDUCIALUFIDUCIAL  [MICRO-FIDUCIAL]  132.84,103.89 0 top
JP292  [1X03]  171.7,105.41 90 top
JP293  FIDUCIALUFIDUCIAL  [MICRO-FIDUCIAL]  172.21,112.39 0 top
JP294  FIDUCIALUFIDUCIAL  [MICRO-FIDUCIAL]  153.67,103.89 0 top
JP295  [1X03]  192.53,105.41 90 top
JP296  FIDUCIALUFIDUCIAL  [MICRO-FIDUCIAL]  193.04,112.39 0 top
JP297  FIDUCIALUFIDUCIAL  [MICRO-FIDUCIAL]  174.5,103.89 0 top
JP298  [1X03]  213.36,105.41 90 top
JP299  FIDUCIALUFIDUCIAL  [MICRO-FIDUCIAL]  213.87,112.39 0 top
JP300  FIDUCIALUFIDUCIAL  [MICRO-FIDUCIAL]  195.33,103.89 0 top
LOGO1  OSHW-LOGOMINI  [OSHW-LOGO-MINI]  8.45,15.43 90 top
LOGO2  OSHW-LOGOMINI  [OSHW-LOGO-MINI]  29.27,15.43 90 top
LOGO3  OSHW-LOGOMINI  [OSHW-LOGO-MINI]  50.1,15.43 90 top
LOGO4  OSHW-LOGOMINI  [OSHW-LOGO-MINI]  70.93,15.43 90 top
LOGO5  OSHW-LOGOMINI  [OSHW-LOGO-MINI]  91.76,15.43 90 top
LOGO6  OSHW-LOGOMINI  [OSHW-LOGO-MINI]  112.59,15.43 90 top
LOGO7  OSHW-LOGOMINI  [OSHW-LOGO-MINI]  133.41,15.43 90 top
LOGO8  OSHW-LOGOMINI  [OSHW-LOGO-MINI]  154.24,15.43 90 top
LOGO9  OSHW-LOGOMINI  [OSHW-LOGO-MINI]  175.07,15.43 90 top
LOGO10  OSHW-LOGOMINI  [OSHW-LOGO-MINI]  195.9,15.43 90 top
LOGO11  OSHW-LOGOMINI  [OSHW-LOGO-MINI]  8.45,26.1 90 top
LOGO12  OSHW-LOGOMINI  [OSHW-LOGO-MINI]  29.27,26.1 90 top
LOGO13  OSHW-LOGOMINI  [OSHW-LOGO-MINI]  50.1,26.1 90 top
LOGO14  OSHW-LOGOMINI  [OSHW-LOGO-MINI]  70.93,26.1 90 top
LOGO15  OSHW-LOGOMINI  [OSHW-LOGO-MINI]  91.76,26.1 90 top
LOGO16  OSHW-LOGOMINI  [OSHW-LOGO-MINI]  112.59,26.1 90 top
LOGO17  OSHW-LOGOMINI  [OSHW-LOGO-MINI]  133.41,26.1 90 top
LOGO18  OSHW-LOGOMINI  [OSHW-LOGO-MINI]  154.24,26.1 90 top
LOGO19  OSHW-LOGOMINI  [OSHW-LOGO-MINI]  175.07,26.1 90 top
LOGO20  OSHW-LOGOMINI  [OSHW-LOGO-MINI]  195.9,26.1 90 top
LOGO21  OSHW-LOGOMINI  [OSHW-LOGO-MINI]  8.45,36.77 90 top
LOGO22  OSHW-LOGOMINI  [OSHW-LOGO-MINI]  29.27,36.77 90 top
LOGO23  OSHW-LOGOMINI  [OSHW-LOGO-MINI]  50.1,36.77 90 top
LOGO24  OSHW-LOGOMINI  [OSHW-LOGO-MINI]  70.93,36.77 90 top
LOGO25  OSHW-LOGOMINI  [OSHW-LOGO-MINI]  91.76,36.77 90 top
LOGO26  OSHW-LOGOMINI  [OSHW-LOGO-MINI]  112.59,36.77 90 top
LOGO27  OSHW-LOGOMINI  [OSHW-LOGO-MINI]  133.41,36.77 90 top
LOGO28  OSHW-LOGOMINI  [OSHW-LOGO-MINI]  154.24,36.77 90 top
LOGO29  OSHW-LOGOMINI  [OSHW-LOGO-MINI]  175.07,36.77 90 top
LOGO30  OSHW-LOGOMINI  [OSHW-LOGO-MINI]  195.9,36.77 90 top
LOGO31  OSHW-LOGOMINI  [OSHW-LOGO-MINI]  8.45,47.43 90 top
LOGO32  OSHW-LOGOMINI  [OSHW-LOGO-MINI]  29.27,47.43 90 top
LOGO33  OSHW-LOGOMINI  [OSHW-LOGO-MINI]  50.1,47.43 90 top
LOGO34  OSHW-LOGOMINI  [OSHW-LOGO-MINI]  70.93,47.43 90 top
LOGO35  OSHW-LOGOMINI  [OSHW-LOGO-MINI]  91.76,47.43 90 top
LOGO36  OSHW-LOGOMINI  [OSHW-LOGO-MINI]  112.59,47.43 90 top
LOGO37  OSHW-LOGOMINI  [OSHW-LOGO-MINI]  133.41,47.43 90 top
LOGO38  OSHW-LOGOMINI  [OSHW-LOGO-MINI]  154.24,47.43 90 top
LOGO39  OSHW-LOGOMINI  [OSHW-LOGO-MINI]  175.07,47.43 90 top
LOGO40  OSHW-LOGOMINI  [OSHW-LOGO-MINI]  195.9,47.43 90 top
LOGO41  OSHW-LOGOMINI  [OSHW-LOGO-MINI]  8.45,58.1 90 top
LOGO42  OSHW-LOGOMINI  [OSHW-LOGO-MINI]  29.27,58.1 90 top
LOGO43  OSHW-LOGOMINI  [OSHW-LOGO-MINI]  50.1,58.1 90 top
LOGO44  OSHW-LOGOMINI  [OSHW-LOGO-MINI]  70.93,58.1 90 top
LOGO45  OSHW-LOGOMINI  [OSHW-LOGO-MINI]  91.76,58.1 90 top
LOGO46  OSHW-LOGOMINI  [OSHW-LOGO-MINI]  112.59,58.1 90 top
LOGO47  OSHW-LOGOMINI  [OSHW-LOGO-MINI]  133.41,58.1 90 top
LOGO48  OSHW-LOGOMINI  [OSHW-LOGO-MINI]  154.24,58.1 90 top
LOGO49  OSHW-LOGOMINI  [OSHW-LOGO-MINI]  175.07,58.1 90 top
LOGO50  OSHW-LOGOMINI  [OSHW-LOGO-MINI]  195.9,58.1 90 top
LOGO51  OSHW-LOGOMINI  [OSHW-LOGO-MINI]  8.45,68.77 90 top
LOGO52  OSHW-LOGOMINI  [OSHW-LOGO-MINI]  29.27,68.77 90 top
LOGO53  OSHW-LOGOMINI  [OSHW-LOGO-MINI]  50.1,68.77 90 top
LOGO54  OSHW-LOGOMINI  [OSHW-LOGO-MINI]  70.93,68.77 90 top
LOGO55  OSHW-LOGOMINI  [OSHW-LOGO-MINI]  91.76,68.77 90 top
LOGO56  OSHW-LOGOMINI  [OSHW-LOGO-MINI]  112.59,68.77 90 top
LOGO57  OSHW-LOGOMINI  [OSHW-LOGO-MINI]  133.41,68.77 90 top
LOGO58  OSHW-LOGOMINI  [OSHW-LOGO-MINI]  154.24,68.77 90 top
LOGO59  OSHW-LOGOMINI  [OSHW-LOGO-MINI]  175.07,68.77 90 top
LOGO60  OSHW-LOGOMINI  [OSHW-LOGO-MINI]  195.9,68.77 90 top
LOGO61  OSHW-LOGOMINI  [OSHW-LOGO-MINI]  8.45,79.44 90 top
LOGO62  OSHW-LOGOMINI  [OSHW-LOGO-MINI]  29.27,79.44 90 top
LOGO63  OSHW-LOGOMINI  [OSHW-LOGO-MINI]  50.1,79.44 90 top
LOGO64  OSHW-LOGOMINI  [OSHW-LOGO-MINI]  70.93,79.44 90 top
LOGO65  OSHW-LOGOMINI  [OSHW-LOGO-MINI]  91.76,79.44 90 top
LOGO66  OSHW-LOGOMINI  [OSHW-LOGO-MINI]  112.59,79.44 90 top
LOGO67  OSHW-LOGOMINI  [OSHW-LOGO-MINI]  133.41,79.44 90 top
LOGO68  OSHW-LOGOMINI  [OSHW-LOGO-MINI]  154.24,79.44 90 top
LOGO69  OSHW-LOGOMINI  [OSHW-LOGO-MINI]  175.07,79.44 90 top
LOGO70  OSHW-LOGOMINI  [OSHW-LOGO-MINI]  195.9,79.44 90 top
LOGO71  OSHW-LOGOMINI  [OSHW-LOGO-MINI]  8.45,90.11 90 top
LOGO72  OSHW-LOGOMINI  [OSHW-LOGO-MINI]  29.27,90.11 90 top
LOGO73  OSHW-LOGOMINI  [OSHW-LOGO-MINI]  50.1,90.11 90 top
LOGO74  OSHW-LOGOMINI  [OSHW-LOGO-MINI]  70.93,90.11 90 top
LOGO75  OSHW-LOGOMINI  [OSHW-LOGO-MINI]  91.76,90.11 90 top
LOGO76  OSHW-LOGOMINI  [OSHW-LOGO-MINI]  112.59,90.11 90 top
LOGO77  OSHW-LOGOMINI  [OSHW-LOGO-MINI]  133.41,90.11 90 top
LOGO78  OSHW-LOGOMINI  [OSHW-LOGO-MINI]  154.24,90.11 90 top
LOGO79  OSHW-LOGOMINI  [OSHW-LOGO-MINI]  175.07,90.11 90 top
LOGO80  OSHW-LOGOMINI  [OSHW-LOGO-MINI]  195.9,90.11 90 top
LOGO81  OSHW-LOGOMINI  [OSHW-LOGO-MINI]  8.45,100.77 90 top
LOGO82  OSHW-LOGOMINI  [OSHW-LOGO-MINI]  29.27,100.77 90 top
LOGO83  OSHW-LOGOMINI  [OSHW-LOGO-MINI]  50.1,100.77 90 top
LOGO84  OSHW-LOGOMINI  [OSHW-LOGO-MINI]  70.93,100.77 90 top
LOGO85  OSHW-LOGOMINI  [OSHW-LOGO-MINI]  91.76,100.77 90 top
LOGO86  OSHW-LOGOMINI  [OSHW-LOGO-MINI]  112.59,100.77 90 top
LOGO87  OSHW-LOGOMINI  [OSHW-LOGO-MINI]  133.41,100.77 90 top
LOGO88  OSHW-LOGOMINI  [OSHW-LOGO-MINI]  154.24,100.77 90 top
LOGO89  OSHW-LOGOMINI  [OSHW-LOGO-MINI]  175.07,100.77 90 top
LOGO90  OSHW-LOGOMINI  [OSHW-LOGO-MINI]  195.9,100.77 90 top
LOGO91  OSHW-LOGOMINI  [OSHW-LOGO-MINI]  8.45,111.44 90 top
LOGO92  OSHW-LOGOMINI  [OSHW-LOGO-MINI]  29.27,111.44 90 top
LOGO93  OSHW-LOGOMINI  [OSHW-LOGO-MINI]  50.1,111.44 90 top
LOGO94  OSHW-LOGOMINI  [OSHW-LOGO-MINI]  70.93,111.44 90 top
LOGO95  OSHW-LOGOMINI  [OSHW-LOGO-MINI]  91.76,111.44 90 top
LOGO96  OSHW-LOGOMINI  [OSHW-LOGO-MINI]  112.59,111.44 90 top
LOGO97  OSHW-LOGOMINI  [OSHW-LOGO-MINI]  133.41,111.44 90 top
LOGO98  OSHW-LOGOMINI  [OSHW-LOGO-MINI]  154.24,111.44 90 top
LOGO99  OSHW-LOGOMINI  [OSHW-LOGO-MINI]  175.07,111.44 90 top
LOGO100  OSHW-LOGOMINI  [OSHW-LOGO-MINI]  195.9,111.44 90 top
MIC  9.7MM  [MIC-9.7MM]  11.94,11.94 180 bottom
MIC1  9.7MM  [MIC-9.7MM]  32.77,11.94 180 bottom
MIC2  9.7MM  [MIC-9.7MM]  53.59,11.94 180 bottom
MIC3  9.7MM  [MIC-9.7MM]  74.42,11.94 180 bottom
MIC4  9.7MM  [MIC-9.7MM]  95.25,11.94 180 bottom
MIC5  9.7MM  [MIC-9.7MM]  116.08,11.94 180 bottom
MIC6  9.7MM  [MIC-9.7MM]  136.91,11.94 180 bottom
MIC7  9.7MM  [MIC-9.7MM]  157.73,11.94 180 bottom
MIC8  9.7MM  [MIC-9.7MM]  178.56,11.94 180 bottom
MIC9  9.7MM  [MIC-9.7MM]  199.39,11.94 180 bottom
MIC10  9.7MM  [MIC-9.7MM]  11.94,22.61 180 bottom
MIC11  9.7MM  [MIC-9.7MM]  32.77,22.61 180 bottom
MIC12  9.7MM  [MIC-9.7MM]  53.59,22.61 180 bottom
MIC13  9.7MM  [MIC-9.7MM]  74.42,22.61 180 bottom
MIC14  9.7MM  [MIC-9.7MM]  95.25,22.61 180 bottom
MIC15  9.7MM  [MIC-9.7MM]  116.08,22.61 180 bottom
MIC16  9.7MM  [MIC-9.7MM]  136.91,22.61 180 bottom
MIC17  9.7MM  [MIC-9.7MM]  157.73,22.61 180 bottom
MIC18  9.7MM  [MIC-9.7MM]  178.56,22.61 180 bottom
MIC19  9.7MM  [MIC-9.7MM]  199.39,22.61 180 bottom
MIC20  9.7MM  [MIC-9.7MM]  11.94,33.27 180 bottom
MIC21  9.7MM  [MIC-9.7MM]  32.77,33.27 180 bottom
MIC22  9.7MM  [MIC-9.7MM]  53.59,33.27 180 bottom
MIC23  9.7MM  [MIC-9.7MM]  74.42,33.27 180 bottom
MIC24  9.7MM  [MIC-9.7MM]  95.25,33.27 180 bottom
MIC25  9.7MM  [MIC-9.7MM]  116.08,33.27 180 bottom
MIC26  9.7MM  [MIC-9.7MM]  136.91,33.27 180 bottom
MIC27  9.7MM  [MIC-9.7MM]  157.73,33.27 180 bottom
MIC28  9.7MM  [MIC-9.7MM]  178.56,33.27 180 bottom
MIC29  9.7MM  [MIC-9.7MM]  199.39,33.27 180 bottom
MIC30  9.7MM  [MIC-9.7MM]  11.94,43.94 180 bottom
MIC31  9.7MM  [MIC-9.7MM]  32.77,43.94 180 bottom
MIC32  9.7MM  [MIC-9.7MM]  53.59,43.94 180 bottom
MIC33  9.7MM  [MIC-9.7MM]  74.42,43.94 180 bottom
MIC34  9.7MM  [MIC-9.7MM]  95.25,43.94 180 bottom
MIC35  9.7MM  [MIC-9.7MM]  116.08,43.94 180 bottom
MIC36  9.7MM  [MIC-9.7MM]  136.91,43.94 180 bottom
MIC37  9.7MM  [MIC-9.7MM]  157.73,43.94 180 bottom
MIC38  9.7MM  [MIC-9.7MM]  178.56,43.94 180 bottom
MIC39  9.7MM  [MIC-9.7MM]  199.39,43.94 180 bottom
MIC40  9.7MM  [MIC-9.7MM]  11.94,54.61 180 bottom
MIC41  9.7MM  [MIC-9.7MM]  32.77,54.61 180 bottom
MIC42  9.7MM  [MIC-9.7MM]  53.59,54.61 180 bottom
MIC43  9.7MM  [MIC-9.7MM]  74.42,54.61 180 bottom
MIC44  9.7MM  [MIC-9.7MM]  95.25,54.61 180 bottom
MIC45  9.7MM  [MIC-9.7MM]  116.08,54.61 180 bottom
MIC46  9.7MM  [MIC-9.7MM]  136.91,54.61 180 bottom
MIC47  9.7MM  [MIC-9.7MM]  157.73,54.61 180 bottom
MIC48  9.7MM  [MIC-9.7MM]  178.56,54.61 180 bottom
MIC49  9.7MM  [MIC-9.7MM]  199.39,54.61 180 bottom
MIC50  9.7MM  [MIC-9.7MM]  11.94,65.28 180 bottom
MIC51  9.7MM  [MIC-9.7MM]  32.77,65.28 180 bottom
MIC52  9.7MM  [MIC-9.7MM]  53.59,65.28 180 bottom
MIC53  9.7MM  [MIC-9.7MM]  74.42,65.28 180 bottom
MIC54  9.7MM  [MIC-9.7MM]  95.25,65.28 180 bottom
MIC55  9.7MM  [MIC-9.7MM]  116.08,65.28 180 bottom
MIC56  9.7MM  [MIC-9.7MM]  136.91,65.28 180 bottom
MIC57  9.7MM  [MIC-9.7MM]  157.73,65.28 180 bottom
MIC58  9.7MM  [MIC-9.7MM]  178.56,65.28 180 bottom
MIC59  9.7MM  [MIC-9.7MM]  199.39,65.28 180 bottom
MIC60  9.7MM  [MIC-9.7MM]  11.94,75.95 180 bottom
MIC61  9.7MM  [MIC-9.7MM]  32.77,75.95 180 bottom
MIC62  9.7MM  [MIC-9.7MM]  53.59,75.95 180 bottom
MIC63  9.7MM  [MIC-9.7MM]  74.42,75.95 180 bottom
MIC64  9.7MM  [MIC-9.7MM]  95.25,75.95 180 bottom
MIC65  9.7MM  [MIC-9.7MM]  116.08,75.95 180 bottom
MIC66  9.7MM  [MIC-9.7MM]  136.91,75.95 180 bottom
MIC67  9.7MM  [MIC-9.7MM]  157.73,75.95 180 bottom
MIC68  9.7MM  [MIC-9.7MM]  178.56,75.95 180 bottom
MIC69  9.7MM  [MIC-9.7MM]  199.39,75.95 180 bottom
MIC70  9.7MM  [MIC-9.7MM]  11.94,86.61 180 bottom
MIC71  9.7MM  [MIC-9.7MM]  32.77,86.61 180 bottom
MIC72  9.7MM  [MIC-9.7MM]  53.59,86.61 180 bottom
MIC73  9.7MM  [MIC-9.7MM]  74.42,86.61 180 bottom
MIC74  9.7MM  [MIC-9.7MM]  95.25,86.61 180 bottom
MIC75  9.7MM  [MIC-9.7MM]  116.08,86.61 180 bottom
MIC76  9.7MM  [MIC-9.7MM]  136.91,86.61 180 bottom
MIC77  9.7MM  [MIC-9.7MM]  157.73,86.61 180 bottom
MIC78  9.7MM  [MIC-9.7MM]  178.56,86.61 180 bottom
MIC79  9.7MM  [MIC-9.7MM]  199.39,86.61 180 bottom
MIC80  9.7MM  [MIC-9.7MM]  11.94,97.28 180 bottom
MIC81  9.7MM  [MIC-9.7MM]  32.77,97.28 180 bottom
MIC82  9.7MM  [MIC-9.7MM]  53.59,97.28 180 bottom
MIC83  9.7MM  [MIC-9.7MM]  74.42,97.28 180 bottom
MIC84  9.7MM  [MIC-9.7MM]  95.25,97.28 180 bottom
MIC85  9.7MM  [MIC-9.7MM]  116.08,97.28 180 bottom
MIC86  9.7MM  [MIC-9.7MM]  136.91,97.28 180 bottom
MIC87  9.7MM  [MIC-9.7MM]  157.73,97.28 180 bottom
MIC88  9.7MM  [MIC-9.7MM]  178.56,97.28 180 bottom
MIC89  9.7MM  [MIC-9.7MM]  199.39,97.28 180 bottom
MIC90  9.7MM  [MIC-9.7MM]  11.94,107.95 180 bottom
MIC91  9.7MM  [MIC-9.7MM]  32.77,107.95 180 bottom
MIC92  9.7MM  [MIC-9.7MM]  53.59,107.95 180 bottom
MIC93  9.7MM  [MIC-9.7MM]  74.42,107.95 180 bottom
MIC94  9.7MM  [MIC-9.7MM]  95.25,107.95 180 bottom
MIC95  9.7MM  [MIC-9.7MM]  116.08,107.95 180 bottom
MIC96  9.7MM  [MIC-9.7MM]  136.91,107.95 180 bottom
MIC97  9.7MM  [MIC-9.7MM]  157.73,107.95 180 bottom
MIC98  9.7MM  [MIC-9.7MM]  178.56,107.95 180 bottom
MIC99  9.7MM  [MIC-9.7MM]  199.39,107.95 180 bottom
R1  2.2k  [0603-RES]  15.43,12.26 270 top
R2  10K  [0603-RES]  19.56,9.08 180 top
R3  10K  [0603-RES]  23.05,14.16 90 top
R4  10K  [0603-RES]  17.02,12.26 90 top
R5  820k  [0603-RES]  19.56,15.75 180 top
R6  2.2k  [0603-RES]  36.26,12.26 270 top
R7  10K  [0603-RES]  40.39,9.08 180 top
R8  10K  [0603-RES]  43.88,14.16 90 top
R9  10K  [0603-RES]  37.85,12.26 90 top
R10  820k  [0603-RES]  40.39,15.75 180 top
R11  2.2k  [0603-RES]  57.09,12.26 270 top
R12  10K  [0603-RES]  61.21,9.08 180 top
R13  10K  [0603-RES]  64.71,14.16 90 top
R14  10K  [0603-RES]  58.67,12.26 90 top
R15  820k  [0603-RES]  61.21,15.75 180 top
R16  2.2k  [0603-RES]  77.91,12.26 270 top
R17  10K  [0603-RES]  82.04,9.08 180 top
R18  10K  [0603-RES]  85.53,14.16 90 top
R19  10K  [0603-RES]  79.5,12.26 90 top
R20  820k  [0603-RES]  82.04,15.75 180 top
R21  2.2k  [0603-RES]  98.74,12.26 270 top
R22  10K  [0603-RES]  102.87,9.08 180 top
R23  10K  [0603-RES]  106.36,14.16 90 top
R24  10K  [0603-RES]  100.33,12.26 90 top
R25  820k  [0603-RES]  102.87,15.75 180 top
R26  2.2k  [0603-RES]  119.57,12.26 270 top
R27  10K  [0603-RES]  123.7,9.08 180 top
R28  10K  [0603-RES]  127.19,14.16 90 top
R29  10K  [0603-RES]  121.16,12.26 90 top
R30  820k  [0603-RES]  123.7,15.75 180 top
R31  2.2k  [0603-RES]  140.4,12.26 270 top
R32  10K  [0603-RES]  144.53,9.08 180 top
R33  10K  [0603-RES]  148.02,14.16 90 top
R34  10K  [0603-RES]  141.99,12.26 90 top
R35  820k  [0603-RES]  144.53,15.75 180 top
R36  2.2k  [0603-RES]  161.23,12.26 270 top
R37  10K  [0603-RES]  165.35,9.08 180 top
R38  10K  [0603-RES]  168.85,14.16 90 top
R39  10K  [0603-RES]  162.81,12.26 90 top
R40  820k  [0603-RES]  165.35,15.75 180 top
R41  2.2k  [0603-RES]  182.05,12.26 270 top
R42  10K  [0603-RES]  186.18,9.08 180 top
R43  10K  [0603-RES]  189.67,14.16 90 top
R44  10K  [0603-RES]  183.64,12.26 90 top
R45  820k  [0603-RES]  186.18,15.75 180 top
R46  2.2k  [0603-RES]  202.88,12.26 270 top
R47  10K  [0603-RES]  207.01,9.08 180 top
R48  10K  [0603-RES]  210.5,14.16 90 top
R49  10K  [0603-RES]  204.47,12.26 90 top
R50  820k  [0603-RES]  207.01,15.75 180 top
R51  2.2k  [0603-RES]  15.43,22.92 270 top
R52  10K  [0603-RES]  19.56,19.75 180 top
R53  10K  [0603-RES]  23.05,24.83 90 top
R54  10K  [0603-RES]  17.02,22.92 90 top
R55  820k  [0603-RES]  19.56,26.42 180 top
R56  2.2k  [0603-RES]  36.26,22.92 270 top
R57  10K  [0603-RES]  40.39,19.75 180 top
R58  10K  [0603-RES]  43.88,24.83 90 top
R59  10K  [0603-RES]  37.85,22.92 90 top
R60  820k  [0603-RES]  40.39,26.42 180 top
R61  2.2k  [0603-RES]  57.09,22.92 270 top
R62  10K  [0603-RES]  61.21,19.75 180 top
R63  10K  [0603-RES]  64.71,24.83 90 top
R64  10K  [0603-RES]  58.67,22.92 90 top
R65  820k  [0603-RES]  61.21,26.42 180 top
R66  2.2k  [0603-RES]  77.91,22.92 270 top
R67  10K  [0603-RES]  82.04,19.75 180 top
R68  10K  [0603-RES]  85.53,24.83 90 top
R69  10K  [0603-RES]  79.5,22.92 90 top
R70  820k  [0603-RES]  82.04,26.42 180 top
R71  2.2k  [0603-RES]  98.74,22.92 270 top
R72  10K  [0603-RES]  102.87,19.75 180 top
R73  10K  [0603-RES]  106.36,24.83 90 top
R74  10K  [0603-RES]  100.33,22.92 90 top
R75  820k  [0603-RES]  102.87,26.42 180 top
R76  2.2k  [0603-RES]  119.57,22.92 270 top
R77  10K  [0603-RES]  123.7,19.75 180 top
R78  10K  [0603-RES]  127.19,24.83 90 top
R79  10K  [0603-RES]  121.16,22.92 90 top
R80  820k  [0603-RES]  123.7,26.42 180 top
R81  2.2k  [0603-RES]  140.4,22.92 270 top
R82  10K  [0603-RES]  144.53,19.75 180 top
R83  10K  [0603-RES]  148.02,24.83 90 top
R84  10K  [0603-RES]  141.99,22.92 90 top
R85  820k  [0603-RES]  144.53,26.42 180 top
R86  2.2k  [0603-RES]  161.23,22.92 270 top
R87  10K  [0603-RES]  165.35,19.75 180 top
R88  10K  [0603-RES]  168.85,24.83 90 top
R89  10K  [0603-RES]  162.81,22.92 90 top
R90  820k  [0603-RES]  165.35,26.42 180 top
R91  2.2k  [0603-RES]  182.05,22.92 270 top
R92  10K  [0603-RES]  186.18,19.75 180 top
R93  10K  [0603-RES]  189.67,24.83 90 top
R94  10K  [0603-RES]  183.64,22.92 90 top
R95  820k  [0603-RES]  186.18,26.42 180 top
R96  2.2k  [0603-RES]  202.88,22.92 270 top
R97  10K  [0603-RES]  207.01,19.75 180 top
R98  10K  [0603-RES]  210.5,24.83 90 top
R99  10K  [0603-RES]  204.47,22.92 90 top
R100  820k  [0603-RES]  207.01,26.42 180 top
R101  2.2k  [0603-RES]  15.43,33.59 270 top
R102  10K  [0603-RES]  19.56,30.42 180 top
R103  10K  [0603-RES]  23.05,35.5 90 top
R104  10K  [0603-RES]  17.02,33.59 90 top
R105  820k  [0603-RES]  19.56,37.08 180 top
R106  2.2k  [0603-RES]  36.26,33.59 270 top
R107  10K  [0603-RES]  40.39,30.42 180 top
R108  10K  [0603-RES]  43.88,35.5 90 top
R109  10K  [0603-RES]  37.85,33.59 90 top
R110  820k  [0603-RES]  40.39,37.08 180 top
R111  2.2k  [0603-RES]  57.09,33.59 270 top
R112  10K  [0603-RES]  61.21,30.42 180 top
R113  10K  [0603-RES]  64.71,35.5 90 top
R114  10K  [0603-RES]  58.67,33.59 90 top
R115  820k  [0603-RES]  61.21,37.08 180 top
R116  2.2k  [0603-RES]  77.91,33.59 270 top
R117  10K  [0603-RES]  82.04,30.42 180 top
R118  10K  [0603-RES]  85.53,35.5 90 top
R119  10K  [0603-RES]  79.5,33.59 90 top
R120  820k  [0603-RES]  82.04,37.08 180 top
R121  2.2k  [0603-RES]  98.74,33.59 270 top
R122  10K  [0603-RES]  102.87,30.42 180 top
R123  10K  [0603-RES]  106.36,35.5 90 top
R124  10K  [0603-RES]  100.33,33.59 90 top
R125  820k  [0603-RES]  102.87,37.08 180 top
R126  2.2k  [0603-RES]  119.57,33.59 270 top
R127  10K  [0603-RES]  123.7,30.42 180 top
R128  10K  [0603-RES]  127.19,35.5 90 top
R129  10K  [0603-RES]  121.16,33.59 90 top
R130  820k  [0603-RES]  123.7,37.08 180 top
R131  2.2k  [0603-RES]  140.4,33.59 270 top
R132  10K  [0603-RES]  144.53,30.42 180 top
R133  10K  [0603-RES]  148.02,35.5 90 top
R134  10K  [0603-RES]  141.99,33.59 90 top
R135  820k  [0603-RES]  144.53,37.08 180 top
R136  2.2k  [0603-RES]  161.23,33.59 270 top
R137  10K  [0603-RES]  165.35,30.42 180 top
R138  10K  [0603-RES]  168.85,35.5 90 top
R139  10K  [0603-RES]  162.81,33.59 90 top
R140  820k  [0603-RES]  165.35,37.08 180 top
R141  2.2k  [0603-RES]  182.05,33.59 270 top
R142  10K  [0603-RES]  186.18,30.42 180 top
R143  10K  [0603-RES]  189.67,35.5 90 top
R144  10K  [0603-RES]  183.64,33.59 90 top
R145  820k  [0603-RES]  186.18,37.08 180 top
R146  2.2k  [0603-RES]  202.88,33.59 270 top
R147  10K  [0603-RES]  207.01,30.42 180 top
R148  10K  [0603-RES]  210.5,35.5 90 top
R149  10K  [0603-RES]  204.47,33.59 90 top
R150  820k  [0603-RES]  207.01,37.08 180 top
R151  2.2k  [0603-RES]  15.43,44.26 270 top
R152  10K  [0603-RES]  19.56,41.08 180 top
R153  10K  [0603-RES]  23.05,46.16 90 top
R154  10K  [0603-RES]  17.02,44.26 90 top
R155  820k  [0603-RES]  19.56,47.75 180 top
R156  2.2k  [0603-RES]  36.26,44.26 270 top
R157  10K  [0603-RES]  40.39,41.08 180 top
R158  10K  [0603-RES]  43.88,46.16 90 top
R159  10K  [0603-RES]  37.85,44.26 90 top
R160  820k  [0603-RES]  40.39,47.75 180 top
R161  2.2k  [0603-RES]  57.09,44.26 270 top
R162  10K  [0603-RES]  61.21,41.08 180 top
R163  10K  [0603-RES]  64.71,46.16 90 top
R164  10K  [0603-RES]  58.67,44.26 90 top
R165  820k  [0603-RES]  61.21,47.75 180 top
R166  2.2k  [0603-RES]  77.91,44.26 270 top
R167  10K  [0603-RES]  82.04,41.08 180 top
R168  10K  [0603-RES]  85.53,46.16 90 top
R169  10K  [0603-RES]  79.5,44.26 90 top
R170  820k  [0603-RES]  82.04,47.75 180 top
R171  2.2k  [0603-RES]  98.74,44.26 270 top
R172  10K  [0603-RES]  102.87,41.08 180 top
R173  10K  [0603-RES]  106.36,46.16 90 top
R174  10K  [0603-RES]  100.33,44.26 90 top
R175  820k  [0603-RES]  102.87,47.75 180 top
R176  2.2k  [0603-RES]  119.57,44.26 270 top
R177  10K  [0603-RES]  123.7,41.08 180 top
R178  10K  [0603-RES]  127.19,46.16 90 top
R179  10K  [0603-RES]  121.16,44.26 90 top
R180  820k  [0603-RES]  123.7,47.75 180 top
R181  2.2k  [0603-RES]  140.4,44.26 270 top
R182  10K  [0603-RES]  144.53,41.08 180 top
R183  10K  [0603-RES]  148.02,46.16 90 top
R184  10K  [0603-RES]  141.99,44.26 90 top
R185  820k  [0603-RES]  144.53,47.75 180 top
R186  2.2k  [0603-RES]  161.23,44.26 270 top
R187  10K  [0603-RES]  165.35,41.08 180 top
R188  10K  [0603-RES]  168.85,46.16 90 top
R189  10K  [0603-RES]  162.81,44.26 90 top
R190  820k  [0603-RES]  165.35,47.75 180 top
R191  2.2k  [0603-RES]  182.05,44.26 270 top
R192  10K  [0603-RES]  186.18,41.08 180 top
R193  10K  [0603-RES]  189.67,46.16 90 top
R194  10K  [0603-RES]  183.64,44.26 90 top
R195  820k  [0603-RES]  186.18,47.75 180 top
R196  2.2k  [0603-RES]  202.88,44.26 270 top
R197  10K  [0603-RES]  207.01,41.08 180 top
R198  10K  [0603-RES]  210.5,46.16 90 top